# Altium PCB STM32F103ZET6.PCBDOC (part 3 of 5)
Units mil, origin at the board's own origin, x right, y up, seen from the top; angles counter-clockwise.
Board outline 7118.03 x 3660.03 mil, 2 copper layers (Top Layer, Bottom Layer); 158 components, 198 nets, 727 pads, 128 vias.
Unrouted connection lines stored in the file: 5.
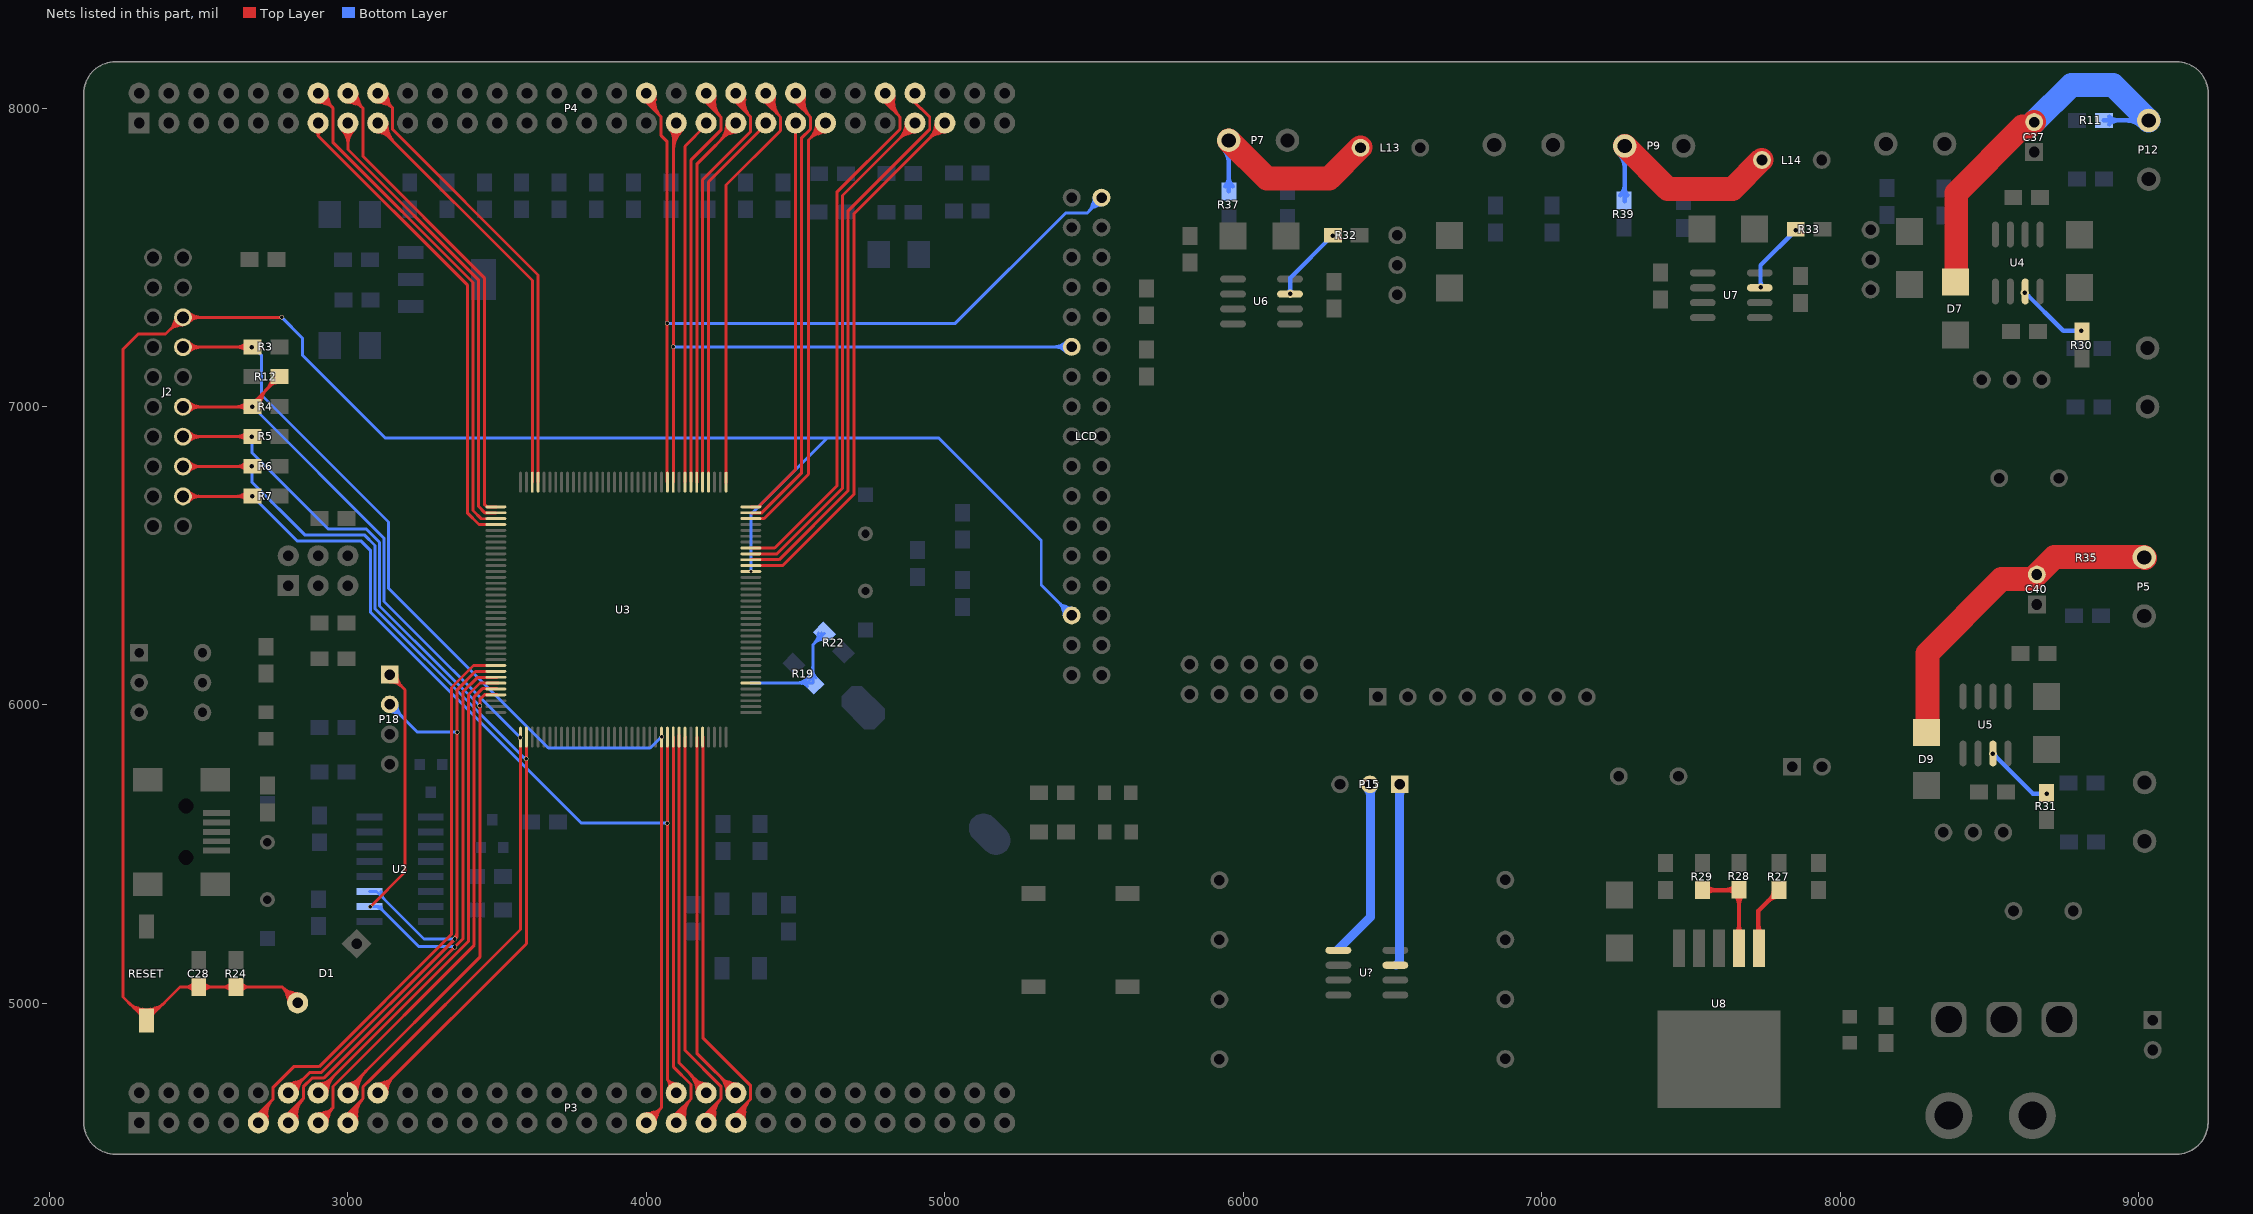
[diagram p3: the nets of this part, all layers, seen from the top]

## Via types
v1: diameter 15, hole 12, Top Layer to Bottom Layer, 57 vias
v2: diameter 28, hole 15, Top Layer to Bottom Layer, 53 vias
v3: diameter 50, hole 28, Top Layer to Bottom Layer, 10 vias
v4: diameter 12, hole 10, Top Layer to Bottom Layer, 4 vias
v5: diameter 20, hole 15, Top Layer to Bottom Layer, 2 vias
v6: diameter 48, hole 28, Top Layer to Bottom Layer, 1 vias
v7: diameter 40, hole 28, Top Layer to Bottom Layer, 1 vias

## Nets (pads, with @x,y where several pads share a name; then routed paths per layer and width w, separated by ;. In a path a pad name is that pad's centre, name@x,y a point inside that pad or via, vN(x,y) a via of type N, cw(c..) or ccw(c..) an arc to the next point about the centre after c; other vN are vias at no path point) (continued)
NetR19_2: R19.2 R22.2 U3.6 | length 1000.7
  Bottom Layer w10: 4349,6073 4349.18,6073.18 R19.2@4557.82,6073.18 4557.82,6201.82 R22.2@4596,6240 ; R19.2@4540.14,6090.86 cw(c4497.46,6133.54) 4497.46,6073.18 ccw(c4497.46,6133.54) R19.2@4540.14,6090.86 ; R19.2@4540.14,6090.86 ccw(c4497.46,6133.54) 4557.82,6133.54 cw(c4497.46,6133.54) R19.2@4540.14,6090.86 ; R19.2@4547.21,6083.79 cw(c4521.61,6109.39) 4521.61,6073.18 ccw(c4521.61,6109.39) R19.2@4547.21,6083.79 ; R19.2@4547.21,6083.79 ccw(c4521.61,6109.39) 4557.82,6109.39 cw(c4521.61,6109.39) R19.2@4547.21,6083.79 ; 4514.54,6073.18 cw(c4514.54,6036.97) 4540.14,6062.57 ccw(c4514.54,6036.97) 4514.54,6073.18 ; 4557.82,6116.46 ccw(c4594.03,6116.46) 4568.43,6090.86 cw(c4594.03,6116.46) 4557.82,6116.46 ; 4561.59,6205.59 ccw(c4526.35,6240.82) 4576.18,6240.82 cw(c4526.35,6240.82) 4561.59,6205.59 ; 4563.13,6207.13 cw(c4596.18,6174.08) 4596.18,6220.82 ccw(c4596.18,6174.08) 4563.13,6207.13 ; 4578.66,6222.66 ccw(c4560.49,6240.82) 4586.18,6240.82 cw(c4560.49,6240.82) 4578.66,6222.66
NetR27_1: R27.1 U8.1 | length 340.9
  Top Layer w15: U8.1@7718.55,5235.86 ccw(c7700.55,5253.85) 7726,5253.85 ; U8.1@7726,5184 7726,5311 R27.1@7795,5380 ; 7726,5262.82 ccw(c7764.14,5262.82) U8.1@7737.17,5235.86 ; 7756.59,5341.59 cw(c7795,5303.18) R27.1@7795,5357.5 ; 7768.66,5353.66 ccw(c7747.32,5375) R27.1@7777.5,5375
NetR28_1: R28.1 R29.2 U8.2 | length 566.4
  Top Layer w15: R29.2@7538,5380 7660,5380 R28.1@7661,5381 U8.2@7661,5187 ; R29.2@7550.37,5367.63 cw(c7580.25,5337.75) 7580.25,5380 cw(c7580.25,5422.25) R29.2@7550.37,5392.37 ; 7616.34,5380 ccw(c7616.34,5425.66) R28.1@7648.63,5393.37 ; 7621.17,5380 cw(c7621.17,5341.17) R28.1@7648.63,5368.63 ; R28.1@7648.63,5363.63 cw(c7618.75,5333.75) 7661,5333.75 cw(c7703.25,5333.75) R28.1@7673.37,5363.63 ; U8.2@7651.62,5235.86 ccw(c7628.96,5258.51) 7661,5258.51 ; 7661,5258.17 ccw(c7692.55,5258.17) U8.2@7670.24,5235.86
NetR30_1: R30.1 U4.7 | length 279.9
  Bottom Layer w15: v2@8619,7374.5 cw(c8619,7356.39) 8631.8,7369.2 ; v2@8619,7382 8747,7254 v2(8807,7254) ; v2@8802.4,7249.4 ccw(c8791.31,7238.31) 8791.31,7254 ccw(c8791.31,7269.69) v2@8802.4,7258.6
  other v2: 8619,7381
NetR31_1: R31.1 U5.7 | length 286.8
  Bottom Layer w15: v2@8512,5830.5 cw(c8512,5814.81) 8523.1,5825.9 cw(c8534.19,5837) v2@8518.5,5837 ; v2(8512,5837) 8646,5703 v2(8692,5703) v2@8694,5703 ; v2@8687.4,5698.4 ccw(c8676.31,5687.31) 8676.31,5703 ccw(c8676.31,5718.69) v2@8687.4,5707.6
NetR32_1: R32.1 U6.7 | length 303.1
  Bottom Layer w15: v2@6152.4,7382.6 ccw(c6141.31,7393.69) 6157,7393.69 ccw(c6172.69,7393.69) v2@6161.6,7382.6 ; v2@6156,7379 6157,7379 6157,7431 v2(6299,7573) ; v2@6292.5,7573 cw(c6276.81,7573) 6287.9,7561.9 cw(c6299,7550.81) v2@6299,7566.5
  other v2: 6157,7378
NetR33_1: R33.1 U7.7 | length 280.5
  Bottom Layer w15: v2@7733,7399 7733,7473 v2(7851,7591) ; 7733,7417.11 ccw(c7752.11,7417.11) v2@7738.6,7403.6 ; v2@7844.5,7591 cw(c7828.81,7591) 7839.9,7579.9 cw(c7851,7568.81) v2@7851,7584.5
  other v2: 7734,7399
NRST: C28.2 D1.1 J2.15 LCD.5 R24.1 RESET.1 U3.25 | length 10237.6
  Top Layer w10: 2290.91,4986.65 cw(c2277.43,4936.38) RESET.1@2325,4957.52 ; 2295.13,4975.52 cw(c2287.78,4948.1) RESET.1@2315.31,4955.07 ; RESET.1@2303.39,4973.31 ccw(c2307.35,4988.1) RESET.1@2315,4974.84 ; RESET.1@2311.14,4981.23 cw(c2302.06,4947.32) RESET.1@2334.14,4961.58 ; RESET.1@2315.86,4961.58 cw(c2347.94,4947.32) RESET.1@2338.86,4981.23 ; RESET.1@2334.69,4955.07 cw(c2362.22,4948.1) 2354.87,4975.52 ; RESET.1@2335,4974.84 ccw(c2342.65,4988.1) RESET.1@2346.61,4973.31 ; 2359.09,4986.65 ccw(c2372.57,4936.38) RESET.1@2325,4957.52 ; 2415.91,7276.26 cw(c2452.7,7266.4) J2.15@2446.14,7303.93 ; 2422.38,7267.4 ccw(c2411.7,7307.24) J2.15@2451.87,7297.86 ; J2.15@2447,7299 v1@2777,7299 ; J2.15@2447,7300 2446,7300 2389,7243 2297,7243 2246,7192 2246,5021.52 RESET.1@2325,4942.52 2437.48,5055 C28.2@2500,5055 R24.1@2625,5055 2780,5055 ; v1(2778,7299) v1@2779,7299 ; 2793.15,5042.79 cw(c2779.72,4992.67) D1.1@2830.75,5002.09 ; 2794.68,5028.3 ccw(c2841.83,5039.61) D1.1@2828.55,4992.97 ; 2808.45,5038.69 cw(c2796.97,4995.86) D1.1@2840.58,5003.91 ; D1.1@2831,5004 2780,5055 ; RESET.1@2325,4957.52 cw(c2325,4993.73) 2299.39,4968.13 ccw(c2325,4993.73) RESET.1@2325,4957.52 ; RESET.1@2325,4957.52 ccw(c2325,4993.73) 2350.61,4968.13 cw(c2325,4993.73) RESET.1@2325,4957.52 ; RESET.1@2325,4967.52 cw(c2325,5027.88) 2282.32,4985.2 ccw(c2325,5027.88) RESET.1@2325,4967.52 ; RESET.1@2325,4967.52 ccw(c2325,5027.88) 2367.68,4985.2 cw(c2325,5027.88) RESET.1@2325,4967.52 ; RESET.1@2325,4977.52 cw(c2325,5062.02) 2265.25,5002.27 ccw(c2325,5062.02) RESET.1@2325,4977.52 ; RESET.1@2325,4977.52 ccw(c2325,5062.02) 2384.75,5002.27 cw(c2325,5062.02) RESET.1@2325,4977.52 ; 2451.72,5055 cw(c2451.72,5006.72) 2485.86,5040.86 ccw(c2451.72,5006.72) 2451.72,5055 ; 2451.72,5055 ccw(c2451.72,5103.28) 2485.86,5069.14 cw(c2451.72,5103.28) 2451.72,5055 ; 2483.21,7299 cw(c2483.21,7335.21) 2457.61,7309.61 ccw(c2483.21,7335.21) 2483.21,7299 ; 2483.21,7299 ccw(c2483.21,7262.79) 2457.61,7288.39 cw(c2483.21,7262.79) 2483.21,7299 ; 2507.36,7299 cw(c2507.36,7359.36) 2464.68,7316.68 ccw(c2507.36,7359.36) 2507.36,7299 ; 2507.36,7299 ccw(c2507.36,7238.64) 2464.68,7281.32 cw(c2507.36,7238.64) 2507.36,7299 ; 2548.28,5055 cw(c2548.28,5103.28) 2514.14,5069.14 ccw(c2548.28,5103.28) 2548.28,5055 ; 2548.28,5055 ccw(c2548.28,5006.72) 2514.14,5040.86 cw(c2548.28,5006.72) 2548.28,5055 ; 2576.72,5055 cw(c2576.72,5006.72) 2610.86,5040.86 ccw(c2576.72,5006.72) 2576.72,5055 ; 2576.72,5055 ccw(c2576.72,5103.28) 2610.86,5069.14 cw(c2576.72,5103.28) 2576.72,5055 ; 2673.28,5055 cw(c2673.28,5103.28) 2639.14,5069.14 ccw(c2673.28,5103.28) 2673.28,5055 ; 2673.28,5055 ccw(c2673.28,5006.72) 2639.14,5040.86 cw(c2673.28,5006.72) 2673.28,5055 ; 2780,5055 cw(c2729.86,5004.85) 2800.75,5002.98 ccw(c2729.86,5004.85) 2780,5055 ; RESET.1@2301.46,4966.06 cw(c2292.93,4957.52) 2305,4957.52 ccw(c2292.93,4957.52) RESET.1@2301.46,4966.06 ; RESET.1@2345,4957.52 cw(c2357.07,4957.52) 2348.54,4966.06 ccw(c2357.07,4957.52) RESET.1@2345,4957.52 ; 2400.91,7254.91 cw(c2447,7208.82) 2447,7274 ccw(c2447,7208.82) 2400.91,7254.91 ; 2405.74,7259.74 ccw(c2366.47,7299) 2422,7299 cw(c2366.47,7299) 2405.74,7259.74 ; 2417.98,7271.98 cw(c2447,7242.96) 2447,7284 ccw(c2447,7242.96) 2417.98,7271.98 ; 2422.81,7276.81 ccw(c2400.62,7299) 2432,7299 cw(c2400.62,7299) 2422.81,7276.81 ; 2782.05,5052.95 ccw(c2831.17,5102.08) 2831.17,5032.61 cw(c2831.17,5102.08) 2782.05,5052.95 ; 2796.46,5038.54 cw(c2761.91,5004) 2810.75,5002.71 ccw(c2761.91,5004) 2796.46,5038.54 ; 2799.12,5035.88 ccw(c2831.17,5067.94) 2831.17,5022.61 cw(c2831.17,5067.94) 2799.12,5035.88
  Bottom Layer w10: v1(2778,7299) 2847,7230 2847,7173 3126,6894 4603,6894 ; v4@4351,6447 4351,6640 4605,6894 4980,6894 5323,6551 5323,6402 LCD.5@5425,6300 ; 5393.65,6323.68 ccw(c5431.95,6333.94) LCD.5@5424,6295.1 ; 5401.32,6331.35 cw(c5391.06,6293.05) LCD.5@5429.9,6301 ; 5382.32,6342.68 cw(c5339.64,6300) 5400,6300 ccw(c5339.64,6300) 5382.32,6342.68 ; 5382.32,6342.68 ccw(c5425,6385.36) 5425,6325 cw(c5425,6385.36) 5382.32,6342.68 ; 5399.39,6325.61 cw(c5373.79,6300) 5410,6300 ccw(c5373.79,6300) 5399.39,6325.61 ; 5399.39,6325.61 ccw(c5425,6351.21) 5425,6315 cw(c5425,6351.21) 5399.39,6325.61
  other v4: 4351,6448
OUTPUT1: P15.1 U?.3 | length 666.1
  Bottom Layer w30: 6512,5128 6524,5140 P15.1@6524,5734 ; P15.1@6513.73,5723.73 cw(c6488.93,5698.93) 6524,5698.93 cw(c6559.07,5698.93) P15.1@6534.27,5723.73
OUTPUT1+: C37.2 D7.2 P12.1 R11.2 | length 1545
  Top Layer w80: D7.2@8389,7417 8389,7715.64 8611.36,7938 8635,7938 C37.2@8650,7953
  Bottom Layer w15: R11.2@8883,7959 8883.26,7958.74 P12.1@9033.26,7958.74 ; R11.2@8901.37,7946.63 cw(c8930.62,7917.38) 8930.62,7958.74 ; R11.2@8901.37,7971.37 ccw(c8931.88,8001.88) 8931.88,7958.74 ; P12.1@9011.46,7936.2 ccw(c8957.06,7881.8) 8957.06,7958.74 ccw(c8957.06,8035.68) P12.1@9011.46,7981.28 ; P12.1@9022.07,7946.81 ccw(c8993.27,7918.01) 8993.27,7958.74 ccw(c8993.27,7999.47) P12.1@9022.07,7970.67
  Bottom Layer w80: C37.2@8650,7953 8775,8078 8914,8078 9033.26,7958.74 P12.1@9034,7958
OUTPUT2: P15.2 U?.5 | length 659.7
  Bottom Layer w30: 6318,5181 6426,5289 6426,5731 P15.2@6419,5738 ; P15.2@6413.73,5723.73 cw(c6384.1,5694.1) 6426,5694.1 ; 6426,5703.76 cw(c6454.24,5703.76) P15.2@6434.27,5723.73
OUTPUT2+: C40.2 D9.2 P5.1 R35.2 | length 1537.5
  Top Layer w80: D9.2@8289,5905 8292,5905 8292,6173 8541,6422 8644,6422 C40.2@8659,6437 8718,6496 9018,6496 P5.1@9021,6493
  Bottom Layer w15: R35.2@8868,6494 8868.74,6494.74 P5.1@9019,6494.74 ; R35.2@8889.37,6481.63 cw(c8921.04,6449.96) 8921.04,6494.74 ; R35.2@8889.37,6506.37 ccw(c8917.46,6534.46) 8917.46,6494.74 ; P5.1@8996.46,6472.2 ccw(c8942.06,6417.8) 8942.06,6494.74 ccw(c8942.06,6571.68) P5.1@8996.46,6517.28 ; P5.1@9007.07,6482.81 ccw(c8978.27,6454.01) 8978.27,6494.74 ccw(c8978.27,6535.47) P5.1@9007.07,6506.67
OUTPUT3+: L13.1 P7.1 R37.2 | length 960.6
  Top Layer w80: P7.1@5951.26,7892 6079.26,7764 6288,7764 L13.1@6393,7869
  Bottom Layer w15: P7.1@5928.72,7869.46 cw(c5874.32,7815.06) 5951.26,7815.06 cw(c6028.2,7815.06) P7.1@5973.8,7869.46 ; P7.1@5939.33,7880.07 cw(c5910.53,7851.27) 5951.26,7851.27 cw(c5991.99,7851.27) P7.1@5963.19,7880.07 ; R37.2@5939.63,7738.37 ccw(c5911.54,7766.46) 5951.26,7766.46 ; R37.2@5951,7721 5951.26,7721.26 P7.1@5951.26,7892 ; 5951.26,7770.04 ccw(c5996.04,7770.04) R37.2@5964.37,7738.37
OUTPUT4+: L14.1 P9.1 R39.2 | length 996
  Top Layer w80: P9.1@7278.26,7873 7422.26,7729 7639,7729 L14.1@7737,7827
  Bottom Layer w15: P9.1@7255.72,7850.46 cw(c7201.32,7796.06) 7278.26,7796.06 cw(c7355.2,7796.06) P9.1@7300.8,7850.46 ; R39.2@7262.63,7707.37 ccw(c7224.88,7745.12) 7278.26,7745.12 ; P9.1@7266.33,7861.07 cw(c7237.53,7832.27) 7278.26,7832.27 cw(c7318.99,7832.27) P9.1@7290.19,7861.07 ; R39.2@7277.5,7687.5 7278.26,7688.26 P9.1@7278.26,7873 ; 7278.26,7729.38 ccw(c7309.38,7729.38) R39.2@7287.37,7707.37
PA0: P4.47 U3.34 | length 1949.1
  Top Layer w10: U3.34@4351,6625 4394.61,6625 4543,6773.39 4543,7893 P4.47@4600,7950 ; 4560.98,7909.11 ccw(c4547.12,7960.83) P4.47@4599.58,7950.09 ; 4576.61,7913.3 ccw(c4564.85,7957.2) P4.47@4609.37,7948.08 ; 4548.05,7898.05 cw(c4600,7846.1) 4600,7919.57 ccw(c4600,7846.1) 4548.05,7898.05 ; 4548.05,7898.05 ccw(c4496.1,7950) 4569.57,7950 cw(c4496.1,7950) 4548.05,7898.05 ; 4565.12,7915.12 cw(c4600,7880.24) 4600,7929.57 ccw(c4600,7880.24) 4565.12,7915.12 ; 4565.12,7915.12 ccw(c4530.24,7950) 4579.57,7950 cw(c4530.24,7950) 4565.12,7915.12
PA1: P4.46 U3.35 | length 2152.2
  Top Layer w10: U3.35@4351,6644 4386.74,6644 4519,6776.26 4519,7899.09 4549.43,7929.52 4549.43,7970.48 ; P4.46@4500,8050 4500,8019.91 4549.43,7970.48 ; P4.46@4506.66,8056.87 cw(c4452.87,8001.4) 4530.13,8002.59 ; P4.46@4513.62,8064.05 cw(c4476.64,8025.91) 4529.76,8026.73 ; 4549.43,7970.48 cw(c4603.04,8024.09) 4529.51,8042.58 ccw(c4603.04,8024.09) 4549.43,7970.48 ; U3.35@4380.14,6643.98 ccw(c4380.14,6659.88) 4391.38,6648.64 cw(c4380.14,6659.88) U3.35@4380.14,6643.98 ; P4.46@4500.42,8049.89 ccw(c4543.26,8039.12) 4512.02,8007.88 cw(c4543.26,8039.12) P4.46@4500.42,8049.89 ; P4.46@4510.12,8047.46 ccw(c4563.19,8034.11) 4524.49,7995.42 cw(c4563.19,8034.11) P4.46@4510.12,8047.46 ; P4.46@4519.82,8045.02 ccw(c4583.11,8029.1) 4536.96,7982.95 cw(c4583.11,8029.1) P4.46@4519.82,8045.02
PA2: P4.45 U3.36 | length 1379.7
  Top Layer w10: U3.36@4351,6664 4375.3,6664 4500,6788.7 P4.45@4500,7950 ; U3.36@4379.89,6663.92 cw(c4391.17,6663.92) 4383.19,6671.89 ccw(c4391.17,6663.92) U3.36@4379.89,6663.92
PA3: P4.44 U3.37 | length 2000.7
  Top Layer w10: U3.37@4267,6743 4267,7742 4449.43,7924.43 4449.43,7970.48 ; P4.44@4400,8050 4400,8019.91 4449.43,7970.48 ; P4.44@4406.66,8056.87 cw(c4352.87,8001.4) 4430.13,8002.59 ; P4.44@4413.62,8064.05 cw(c4376.64,8025.91) 4429.76,8026.73 ; 4449.43,7970.48 cw(c4503.04,8024.09) 4429.51,8042.58 ccw(c4503.04,8024.09) 4449.43,7970.48 ; P4.44@4400.42,8049.89 ccw(c4443.26,8039.12) 4412.02,8007.88 cw(c4443.26,8039.12) P4.44@4400.42,8049.89 ; P4.44@4410.12,8047.46 ccw(c4463.19,8034.11) 4424.49,7995.42 cw(c4463.19,8034.11) P4.44@4410.12,8047.46 ; P4.44@4419.82,8045.02 ccw(c4483.11,8029.1) 4436.96,7982.95 cw(c4483.11,8029.1) P4.44@4419.82,8045.02
PA4: P4.43 U3.40 | length 1283.5
  Top Layer w10: U3.40@4208,6746 4208,7753 4400,7945 P4.43@4400,7950
PA5: P4.42 U3.41 | length 1989
  Top Layer w10: U3.41@4188,6746 4188,7759.87 4349.43,7921.3 4349.43,7970.48 ; P4.42@4300,8050 4300,8019.91 4349.43,7970.48 ; P4.42@4306.66,8056.87 cw(c4252.87,8001.4) 4330.13,8002.59 ; P4.42@4313.62,8064.05 cw(c4276.64,8025.91) 4329.76,8026.73 ; 4349.43,7970.48 cw(c4403.04,8024.09) 4329.51,8042.58 ccw(c4403.04,8024.09) 4349.43,7970.48 ; P4.42@4300.42,8049.89 ccw(c4343.26,8039.12) 4312.02,8007.88 cw(c4343.26,8039.12) P4.42@4300.42,8049.89 ; P4.42@4310.12,8047.46 ccw(c4363.19,8034.11) 4324.49,7995.42 cw(c4363.19,8034.11) P4.42@4310.12,8047.46 ; P4.42@4319.82,8045.02 ccw(c4383.11,8029.1) 4336.96,7982.95 cw(c4383.11,8029.1) P4.42@4319.82,8045.02
PA6: P4.41 U3.42 | length 1841.1
  Top Layer w10: U3.42@4169,6746 4169,7812 4300,7943 P4.41@4300,7950 ; 4269.46,7912.27 cw(c4305.44,7902.63) P4.41@4301.19,7939.64 ; 4273.26,7926.47 cw(c4303.64,7918.33) P4.41@4300.05,7949.57 ; 4279.41,7914.05 ccw(c4268.81,7953.62) P4.41@4309.5,7948.9 ; 4243.1,7886.1 ccw(c4179.2,7950) 4269.57,7950 cw(c4179.2,7950) 4243.1,7886.1 ; 4260,7903 cw(c4300,7862.99) 4300,7919.57 ccw(c4300,7862.99) 4260,7903 ; 4260.17,7903.17 ccw(c4213.34,7950) 4279.57,7950 cw(c4213.34,7950) 4260.17,7903.17 ; 4277.07,7920.07 cw(c4300,7897.14) 4300,7929.57 ccw(c4300,7897.14) 4277.07,7920.07 ; 4277.24,7920.24 ccw(c4247.48,7950) 4289.57,7950 cw(c4247.48,7950) 4277.24,7920.24
PA7: P4.40 U3.43 | length 1960.7
  Top Layer w10: U3.43@4149,6749 4149,7825 4249.43,7925.43 4249.43,7970.48 ; P4.40@4200,8050 4200,8019.91 4249.43,7970.48 ; P4.40@4206.66,8056.87 cw(c4152.87,8001.4) 4230.13,8002.59 ; P4.40@4213.62,8064.05 cw(c4176.64,8025.91) 4229.76,8026.73 ; 4249.43,7970.48 cw(c4303.04,8024.09) 4229.51,8042.58 ccw(c4303.04,8024.09) 4249.43,7970.48 ; P4.40@4200.42,8049.89 ccw(c4243.26,8039.12) 4212.02,8007.88 cw(c4243.26,8039.12) P4.40@4200.42,8049.89 ; P4.40@4210.12,8047.46 ccw(c4263.19,8034.11) 4224.49,7995.42 cw(c4263.19,8034.11) P4.40@4210.12,8047.46 ; P4.40@4219.82,8045.02 ccw(c4283.11,8029.1) 4236.96,7982.95 cw(c4283.11,8029.1) P4.40@4219.82,8045.02
PA8: P3.9 U3.100 | length 2557.8
  Top Layer w10: P3.9@2700,4600 2700,4630.09 2749.43,4679.52 ; P3.9@2706.66,4593.13 ccw(c2652.87,4648.6) 2730.13,4647.41 ; P3.9@2713.62,4585.95 ccw(c2676.64,4624.09) 2729.76,4623.27 ; U3.100@3500,6132.17 3420.26,6132.17 3347,6058.91 3347,5231.61 2903.39,4788 2818.09,4788 2749.43,4719.34 2749.43,4679.52 ; 2749.43,4679.52 ccw(c2803.04,4625.91) 2729.51,4607.42 cw(c2803.04,4625.91) 2749.43,4679.52 ; P3.9@2700.42,4600.11 cw(c2743.26,4610.88) 2712.02,4642.12 ccw(c2743.26,4610.88) P3.9@2700.42,4600.11 ; P3.9@2710.12,4602.54 cw(c2763.19,4615.89) 2724.49,4654.58 ccw(c2763.19,4615.89) P3.9@2710.12,4602.54 ; P3.9@2719.82,4604.98 cw(c2783.11,4620.9) 2736.96,4667.05 ccw(c2783.11,4620.9) P3.9@2719.82,4604.98
PA9: P3.12 P18.2 U2.3 U3.101 | length 3151.7
  Top Layer w10: P3.12@2790.7,4702.26 cw(c2837.01,4691.02) 2824.68,4737.04 ; P3.12@2800,4700 2805.09,4705.09 2808.31,4705.09 2871.65,4768.43 2910.69,4768.43 3366,5223.74 3366,6051.04 3426.76,6111.8 U3.101@3495,6111.8 ; P3.12@2800.42,4699.9 cw(c2855.67,4686.49) 2840.96,4741.41 ; v1@3360.41,5216.65 cw(c3374.21,5220.34) 3361.84,5227.48 ; P3.12@2800,4720.43 ccw(c2800,4777.54) 2840.38,4737.16 cw(c2800,4777.54) P3.12@2800,4720.43 ; P3.12@2800,4730.43 ccw(c2800,4811.68) 2857.45,4754.23 cw(c2800,4811.68) P3.12@2800,4730.43 ; P3.12@2820.43,4700 cw(c2861.99,4700) 2832.6,4729.38 ccw(c2861.99,4700) P3.12@2820.43,4700 ; P3.12@2830.43,4700 cw(c2896.13,4700) 2849.67,4746.45 ccw(c2896.13,4700) P3.12@2830.43,4700 ; v1@3356.23,5217.77 ccw(c3332.65,5241.35) 3366,5241.35 cw(c3332.65,5241.35) v1@3356.23,5217.77
  Bottom Layer w10: U2.3@3072.64,5375 3096,5375 3255,5216 v1@3357,5216 ; P18.2@3140,5977.47 cw(c3140,5918.26) 3181.87,5960.13 cw(c3223.74,6002) P18.2@3164.53,6002 ; P18.2@3140,5987.47 cw(c3140,5952.4) 3164.8,5977.2 cw(c3189.6,6002) P18.2@3154.53,6002 ; P18.2@3140,6002 3233,5909 v1@3365,5909 ; 3357.55,5909 cw(c3357.55,5899.55) v1@3364.23,5906.23 ; U2.3@3110.95,5375 ccw(c3147.03,5375) 3121.51,5349.49 cw(c3147.03,5375) U2.3@3110.95,5375
  other v1: 3358,5216 3366,5908
PA10: P3.11 P18.1 U2.2 U3.102 | length 3859.9
  Top Layer w10: P3.11@2800,4600 2800,4630.09 2850.57,4680.66 ; P3.11@2806.56,4593.03 ccw(c2753.6,4649.3) 2830.83,4646.96 ; P3.11@2813.41,4585.75 ccw(c2777,4624.44) 2830.1,4622.83 ; v1@3076,5325 3191,5440 3191,6051 P18.1@3140,6102 ; P18.1@3140,6077.47 cw(c3140,6018.26) 3181.87,6060.13 cw(c3223.74,6102) P18.1@3164.53,6102 ; P18.1@3140,6087.47 cw(c3140,6052.4) 3164.8,6077.2 cw(c3189.6,6102) P18.1@3154.53,6102 ; U3.102@3500,6092.8 3434.63,6092.8 3385,6043.17 3385,5215.87 2918.56,4749.43 2879.52,4749.43 2850.57,4720.48 2850.57,4680.66 ; 2850.56,4680.65 ccw(c2906.19,4625.03) 2829.62,4606.98 cw(c2906.19,4625.03) 2850.56,4680.65 ; P3.11@2800.42,4600.1 cw(c2844.58,4610.51) 2812.5,4642.59 ccw(c2844.58,4610.51) P3.11@2800.42,4600.1 ; P3.11@2810.15,4602.39 cw(c2865.12,4615.35) 2825.19,4655.28 ccw(c2865.12,4615.35) P3.11@2810.15,4602.39 ; P3.11@2819.89,4604.69 cw(c2885.65,4620.19) 2837.88,4667.97 ccw(c2885.65,4620.19) P3.11@2819.89,4604.69
  Bottom Layer w10: U2.2@3072.64,5325 3103,5325 3238,5190 v1@3358,5190 ; U2.2@3076.77,5322.23 cw(c3083.45,5315.55) U2.2@3083.45,5325 ; U2.2@3104.13,5318.19 cw(c3104.13,5304.48) 3113.83,5314.17 ccw(c3104.13,5304.48) U2.2@3104.13,5318.19 ; U2.2@3110.95,5325 ccw(c3130.13,5325) 3116.56,5311.44 cw(c3130.13,5325) U2.2@3110.95,5325 ; 3349.55,5190 cw(c3349.55,5180.55) 3356.23,5187.23 ccw(c3349.55,5180.55) 3349.55,5190
  other v1: 3358,5189 3075,5324
PA11: P3.14 U3.103 | length 2046.8
  Top Layer w10: P3.14@2900,4700 2900,4704 3404,5208 3404,6035.3 3442.5,6073.8 U3.103@3505,6073.8 ; P3.14@2900,4720.43 ccw(c2900,4760.11) 2928.05,4732.05 cw(c2900,4760.11) P3.14@2900,4720.43 ; P3.14@2900,4730.43 ccw(c2900,4794.25) 2945.12,4749.12 cw(c2900,4794.25) P3.14@2900,4730.43 ; P3.14@2920.43,4700 cw(c2979.42,4700) 2937.71,4741.71 ccw(c2979.42,4700) P3.14@2920.43,4700 ; P3.14@2930.43,4700 cw(c3013.56,4700) 2954.78,4758.78 ccw(c3013.56,4700) P3.14@2930.43,4700
PA12: P3.13 U3.104 | length 2198
  Top Layer w10: P3.13@2890.76,4602.49 cw(c2936.63,4590.13) 2925.6,4636.33 ; P3.13@2900,4600 2950,4650 ; P3.13@2902.49,4590.76 ccw(c2890.13,4636.63) 2936.33,4625.6 ; U3.104@3500,6054.62 3450.19,6054.62 3423,6027.43 3423,5195 2950,4722 2950,4650 ; 2933.57,4633.57 cw(c2901.8,4665.34) 2900.56,4620.43 ccw(c2901.8,4665.34) 2933.57,4633.57 ; 2933.57,4633.57 ccw(c2965.34,4601.8) 2920.43,4600.56 cw(c2965.34,4601.8) 2933.57,4633.57 ; 2950,4650 cw(c2902.68,4697.32) 2900.84,4630.42 ccw(c2902.68,4697.32) 2950,4650 ; 2950,4650 ccw(c2997.32,4602.68) 2930.42,4600.84 cw(c2997.32,4602.68) 2950,4650
PA13: J2.7 P3.16 R5.1 U3.105 | length 4373.7
  Top Layer w10: J2.7@2447,6899 v2(2678,6899) 2679,6899 R5.1@2680,6900 ; P3.16@2990.44,4700.3 cw(c3027.88,4699.12) 3018.19,4735.31 ; P3.16@2997.9,4710.22 ccw(c2989,4753.53) 3031.71,4742.09 ; P3.16@2999.91,4700.42 ccw(c2992.65,4735.79) 3027.52,4726.44 ; P3.16@3000,4700 3000,4713 3442,5155 v1@3442,5997.84 ; v1@3442,5999 3442,6019.56 3457.37,6034.93 U3.105@3500,6034.93 ; 2483.21,6899 cw(c2483.21,6935.21) 2457.61,6909.61 ccw(c2483.21,6935.21) 2483.21,6899 ; 2483.21,6899 ccw(c2483.21,6862.79) 2457.61,6888.39 cw(c2483.21,6862.79) 2483.21,6899 ; 2507.36,6899 cw(c2507.36,6959.36) 2464.68,6916.68 ccw(c2507.36,6959.36) 2507.36,6899 ; 2507.36,6899 ccw(c2507.36,6838.64) 2464.68,6881.32 cw(c2507.36,6838.64) 2507.36,6899 ; R5.1@2656.27,6899 cw(c2656.27,6877.27) 2671.64,6892.64 ccw(c2656.27,6877.27) R5.1@2656.27,6899 ; R5.1@2656.27,6899 ccw(c2656.27,6920.73) 2671.64,6905.36 cw(c2656.27,6920.73) R5.1@2656.27,6899 ; 2624.3,6899 ccw(c2624.3,6950.7) 2660.86,6914.14 cw(c2624.3,6950.7) 2624.3,6899 ; 2629.13,6899 cw(c2629.13,6854.13) 2660.86,6885.86 ccw(c2629.13,6854.13) 2629.13,6899 ; 2648.44,6899 ccw(c2648.44,6926.56) 2667.93,6907.07 cw(c2648.44,6926.56) 2648.44,6899 ; P3.16@3000,4730.43 ccw(c3000,4772.52) 3029.76,4742.76 cw(c3000,4772.52) P3.16@3000,4730.43 ; P3.16@3010.43,4700 cw(c3067.01,4700) 3027,4740 ccw(c3067.01,4700) P3.16@3010.43,4700 ; P3.16@3020.43,4700 cw(c3101.15,4700) 3044.07,4757.07 ccw(c3101.15,4700) P3.16@3020.43,4700 ; P3.16@3030.43,4700 cw(c3135.29,4700) 3061.14,4774.14 ccw(c3135.29,4700) P3.16@3030.43,4700 ; v1@3439.23,5995.23 cw(c3432.55,5988.55) 3442,5988.55 ccw(c3432.55,5988.55) v1@3439.23,5995.23 ; v1@3439.23,5998.77 ccw(c3432.55,6005.45) 3442,6005.45 cw(c3432.55,6005.45) v1@3439.23,5998.77 ; 3450.59,6028.15 cw(c3465.31,6013.44) 3465.31,6034.25 ccw(c3465.31,6013.44) 3450.59,6028.15
  Bottom Layer w10: v2(2678,6899) 2678,6846 2935,6589 3062,6589 3106,6545 3106,6332 3336.57,6101.43 3337,6101.43 v1@3442.21,5996.21 ; 2678,6877.27 cw(c2699.73,6877.27) 2684.36,6892.64 ccw(c2699.73,6877.27) 2678,6877.27 ; 2678,6877.27 ccw(c2656.27,6877.27) 2671.64,6892.64 cw(c2656.27,6877.27) 2678,6877.27
  other v1: 3441,5997
PA14: J2.9 P3.15 R4.1 R12.2 U3.109 | length 5522.2
  Top Layer w10: J2.9@2447,6999 R4.1@2679,6999 ; R4.1@2680,6999 v2(2680,7000) 2680,7010 R12.2@2770,7100 ; R4.1@2680.48,6999.12 ccw(c2668.27,7021.66) R4.1@2693.03,7015.02 ; R4.1@2680.95,7008.95 ccw(c2684.36,7041.23) R4.1@2704.77,7015.99 ; R4.1@2682.55,7009.69 ccw(c2675.58,7037.22) 2703,7029.87 ; R4.1@2688.95,6999.05 cw(c2699.88,6997.9) R4.1@2692.97,7006.45 ; R4.1@2688.99,7000.46 cw(c2709.05,7001.5) R4.1@2699.25,7019.03 ; R4.1@2689.06,6990.86 ccw(c2674.8,7022.94) R4.1@2708.71,7013.86 ; R4.1@2700.79,7021.61 ccw(c2715.58,7017.65) R4.1@2702.32,7010 ; 2714.14,7034.09 cw(c2663.86,7047.57) R4.1@2685,7000 ; 2737.45,7071.84 cw(c2776.25,7061.44) R12.2@2765,7100 ; R12.2@2742.05,7089 cw(c2770.43,7081.4) R12.2@2762.2,7109.6 ; P3.15@3000,4600 3000,4630.09 3050.57,4680.66 ; P3.15@3006.56,4593.03 ccw(c2953.6,4649.3) 3030.83,4646.96 ; P3.15@3013.41,4585.75 ccw(c2977,4624.44) 3030.1,4622.83 ; U3.109@3578,5888.83 3578,5248 3079.52,4749.52 3079.52,4749.43 3050.57,4720.48 3050.57,4680.66 ; 2483.21,6999 cw(c2483.21,7035.21) 2457.61,7009.61 ccw(c2483.21,7035.21) 2483.21,6999 ; 2483.21,6999 ccw(c2483.21,6962.79) 2457.61,6988.39 cw(c2483.21,6962.79) 2483.21,6999 ; 2507.36,6999 cw(c2507.36,7059.36) 2464.68,7016.68 ccw(c2507.36,7059.36) 2507.36,6999 ; 2507.36,6999 ccw(c2507.36,6938.64) 2464.68,6981.32 cw(c2507.36,6938.64) 2507.36,6999 ; R4.1@2685,7000 cw(c2721.21,7000) 2695.61,7025.61 ccw(c2721.21,7000) R4.1@2685,7000 ; 3050.56,4680.65 ccw(c3106.19,4625.03) 3029.62,4606.98 cw(c3106.19,4625.03) 3050.56,4680.65 ; 2624.3,6999 ccw(c2624.3,7050.7) 2660.86,7014.14 cw(c2624.3,7050.7) 2624.3,6999 ; 2629.13,6999 cw(c2629.13,6954.13) 2660.86,6985.86 ccw(c2629.13,6954.13) 2629.13,6999 ; 2648.44,6999 ccw(c2648.44,7026.56) 2667.93,7007.07 cw(c2648.44,7026.56) 2648.44,6999 ; R4.1@2655.86,6999 ccw(c2655.86,7024.14) 2673.64,7006.36 cw(c2655.86,7024.14) R4.1@2655.86,6999 ; R4.1@2660.69,6999 cw(c2660.69,6980.69) 2673.64,6993.64 ccw(c2660.69,6980.69) R4.1@2660.69,6999 ; R4.1@2679,7000 cw(c2700.73,7000) 2685.36,7015.36 ccw(c2700.73,7000) R4.1@2679,7000 ; R4.1@2685,7020 ccw(c2685,7032.07) 2693.54,7023.54 cw(c2685,7032.07) R4.1@2685,7020 ; R4.1@2689,7000 cw(c2734.87,7000) 2702.44,7032.44 ccw(c2734.87,7000) R4.1@2689,7000 ; R4.1@2695,7000 cw(c2755.36,7000) 2712.68,7042.68 ccw(c2755.36,7000) R4.1@2695,7000 ; R4.1@2705,7000 cw(c2789.5,7000) 2729.75,7059.75 ccw(c2789.5,7000) R4.1@2705,7000 ; 2727.32,7057.32 ccw(c2684.64,7100) 2745,7100 cw(c2684.64,7100) 2727.32,7057.32 ; 2739.39,7069.39 cw(c2765,7043.79) 2765,7080 ccw(c2765,7043.79) 2739.39,7069.39 ; 2744.39,7074.39 ccw(c2718.79,7100) 2755,7100 cw(c2718.79,7100) 2744.39,7074.39 ; P3.15@3000.42,4600.1 cw(c3044.58,4610.51) 3012.5,4642.59 ccw(c3044.58,4610.51) P3.15@3000.42,4600.1 ; P3.15@3010.15,4602.39 cw(c3065.12,4615.35) 3025.19,4655.28 ccw(c3065.12,4615.35) P3.15@3010.15,4602.39 ; P3.15@3019.89,4604.69 cw(c3085.65,4620.19) 3037.88,4667.97 ccw(c3085.65,4620.19) P3.15@3019.89,4604.69 ; U3.109@3575.23,5889.23 cw(c3568.55,5882.55) 3578,5882.55 ccw(c3568.55,5882.55) U3.109@3575.23,5889.23
  Bottom Layer w10: v2(2680,7000) 3121,6559 3121,6347 v1(3577,5891) ; 2695.36,6984.64 cw(c2710.73,7000) 2689,7000 ccw(c2710.73,7000) 2695.36,6984.64 ; 2695.36,6984.64 ccw(c2680,6969.27) 2680,6991 cw(c2680,6969.27) 2695.36,6984.64
PA15: J2.5 P3.18 R6.1 U3.110 | length 4308.2
  Top Layer w10: J2.5@2447,6799 2676,6799 R6.1@2680,6795 ; P3.18@3090.58,4701.7 cw(c3134.01,4693.87) 3122.59,4736.49 ; P3.18@3100,4700 3100,4702 3598,5200 3598,5771.13 3598.17,5771.3 U3.110@3598.17,5890 ; P3.18@3100.43,4699.92 cw(c3151.16,4690.77) 3137.81,4740.57 ; 2483.21,6799 cw(c2483.21,6835.21) 2457.61,6809.61 ccw(c2483.21,6835.21) 2483.21,6799 ; 2483.21,6799 ccw(c2483.21,6762.79) 2457.61,6788.39 cw(c2483.21,6762.79) 2483.21,6799 ; 2507.36,6799 cw(c2507.36,6859.36) 2464.68,6816.68 ccw(c2507.36,6859.36) 2507.36,6799 ; 2507.36,6799 ccw(c2507.36,6738.64) 2464.68,6781.32 cw(c2507.36,6738.64) 2507.36,6799 ; 2624.3,6799 ccw(c2624.3,6850.7) 2660.86,6814.14 cw(c2624.3,6850.7) 2624.3,6799 ; 2629.13,6799 cw(c2629.13,6754.13) 2660.86,6785.86 ccw(c2629.13,6754.13) 2629.13,6799 ; 2648.44,6799 ccw(c2648.44,6826.56) 2667.93,6807.07 cw(c2648.44,6826.56) 2648.44,6799 ; R6.1@2653.86,6799 ccw(c2653.86,6824.14) 2671.64,6806.36 cw(c2653.86,6824.14) R6.1@2653.86,6799 ; R6.1@2658.69,6799 cw(c2658.69,6780.69) 2671.64,6793.64 ccw(c2658.69,6780.69) R6.1@2658.69,6799 ; P3.18@3100,4720.43 ccw(c3100,4764.93) 3131.47,4733.47 cw(c3100,4764.93) P3.18@3100,4720.43 ; P3.18@3100,4730.43 ccw(c3100,4799.08) 3148.54,4750.54 cw(c3100,4799.08) P3.18@3100,4730.43 ; P3.18@3120.43,4700 cw(c3174.59,4700) 3136.3,4738.3 ccw(c3174.59,4700) P3.18@3120.43,4700 ; P3.18@3130.43,4700 cw(c3208.73,4700) 3153.37,4755.37 ccw(c3208.73,4700) P3.18@3130.43,4700 ; v1@3595.23,5818.23 cw(c3588.13,5811.13) 3598.17,5811.13 ccw(c3588.13,5811.13) v1@3595.23,5818.23 ; v1@3595.23,5821.77 ccw(c3588.13,5828.87) 3598.17,5828.87 cw(c3588.13,5828.87) v1@3595.23,5821.77
  Bottom Layer w10: v2(2678,6800) 2678,6747 2855,6570 3055,6570 3091,6534 3091,6322.25 3433.75,5979.5 3433.75,5979.25 3593.39,5819.61 v1@3597.61,5819.61 ; 3586.16,5825.4 cw(c3582.47,5811.61) v1@3594.83,5818.75 ; 2678,6778.27 cw(c2699.73,6778.27) 2684.36,6793.64 ccw(c2699.73,6778.27) 2678,6778.27 ; 2678,6778.27 ccw(c2656.27,6778.27) 2671.64,6793.64 cw(c2656.27,6778.27) 2678,6778.27 ; 3585.9,5827.1 ccw(c3597,5838.19) 3597,5822.5 cw(c3597,5838.19) 3585.9,5827.1
  other v1: 3597,5820
PB0: LCD.23 P4.37 U3.46 | length 3342.4
  Top Layer w10: U3.46@4090,6747 4090,7914 4100,7924 P4.37@4100,7950 ; 4090,7900.67 cw(c4149.33,7900.67) 4107.38,7942.62 ccw(c4149.33,7900.67) 4090,7900.67 ; 4090,7900.67 ccw(c4050.67,7900.67) 4078.48,7928.48 cw(c4050.67,7900.67) 4090,7900.67 ; P4.37@4083.58,7924.38 cw(c4076.06,7912.64) 4090,7912.64 ccw(c4076.06,7912.64) P4.37@4083.58,7924.38 ; 4090,7852.39 cw(c4197.61,7852.39) 4121.52,7928.48 ccw(c4197.61,7852.39) 4090,7852.39 ; 4090,7876.53 cw(c4173.47,7876.53) 4114.45,7935.55 ccw(c4173.47,7876.53) 4090,7876.53
  Bottom Layer w10: v1@4091,7200 LCD.23@5425,7200 ; 5364.64,7200 cw(c5364.64,7139.64) 5407.32,7182.32 ccw(c5364.64,7139.64) 5364.64,7200 ; 5364.64,7200 ccw(c5364.64,7260.36) 5407.32,7217.68 cw(c5364.64,7260.36) 5364.64,7200 ; 5388.79,7200 cw(c5388.79,7163.79) 5414.39,7189.39 ccw(c5388.79,7163.79) 5388.79,7200 ; 5388.79,7200 ccw(c5388.79,7236.21) 5414.39,7210.61 cw(c5388.79,7236.21) 5388.79,7200 ; v1@4091.77,7202.77 ccw(c4098.45,7209.45) 4098.45,7200 cw(c4098.45,7209.45) v1@4091.77,7202.77
  other v1: 4090,7201
PB1: LCD.34 P4.36 U3.47 | length 3954.1
  Top Layer w10: P4.36@4000,8050 4000,8019.91 4049.43,7970.48 ; P4.36@4006.66,8056.87 cw(c3952.87,8001.4) 4030.13,8002.59 ; P4.36@4013.62,8064.05 cw(c3976.64,8025.91) 4029.76,8026.73 ; U3.47@4069.43,6747 4069.43,7887.44 4049.43,7907.44 4049.43,7970.48 ; 4049.43,7970.48 cw(c4103.04,8024.09) 4029.51,8042.58 ccw(c4103.04,8024.09) 4049.43,7970.48 ; P4.36@4000.42,8049.89 ccw(c4043.26,8039.12) 4012.02,8007.88 cw(c4043.26,8039.12) P4.36@4000.42,8049.89 ; P4.36@4010.12,8047.46 ccw(c4063.19,8034.11) 4024.49,7995.42 cw(c4063.19,8034.11) P4.36@4010.12,8047.46 ; P4.36@4019.82,8045.02 ccw(c4083.11,8029.1) 4036.96,7982.95 cw(c4083.11,8029.1) P4.36@4019.82,8045.02
  Bottom Layer w10: P4.36@3999,8051 P4.36@4000,8050 ; v1@4069,7279 5034.87,7279 5403.87,7648 5476,7648 5525,7697 LCD.34@5525,7700 ; 5493.28,7674.91 cw(c5533.91,7664.02) LCD.34@5523.8,7704.85 ; 5502.73,7669.03 ccw(c5493.07,7705.1) LCD.34@5529.94,7699.21 ; 5480.2,7652.2 ccw(c5432.4,7700) 5500,7700 cw(c5432.4,7700) 5480.2,7652.2 ; 5487.44,7659.44 cw(c5525,7621.89) 5525,7675 ccw(c5525,7621.89) 5487.44,7659.44 ; 5497.27,7669.27 ccw(c5466.54,7700) 5510,7700 cw(c5466.54,7700) 5497.27,7669.27 ; 5504.51,7676.51 cw(c5525,7656.03) 5525,7685 ccw(c5525,7656.03) 5504.51,7676.51
  other v1: 4070,7279
PB3: J2.13 P3.35 R3.1 U3.133 | length 4821.7
  Top Layer w10: J2.13@2447,7199 v2(2677,7199) 2679,7199 R3.1@2680,7200 R3.1@2681,7201 ; P3.35@3990.72,4602.31 cw(c4036.11,4591.02) 4024.88,4636.44 ; P3.35@4000,4600 4050.57,4650.57 ; P3.35@4002.31,4590.72 ccw(c3991.02,4636.11) 4036.44,4624.88 ; U3.133@4051,5892 4051,4721.34 4050.57,4720.91 4050.57,4650.57 ; 2483.21,7199 cw(c2483.21,7235.21) 2457.61,7209.61 ccw(c2483.21,7235.21) 2483.21,7199 ; 2483.21,7199 ccw(c2483.21,7162.79) 2457.61,7188.39 cw(c2483.21,7162.79) 2483.21,7199 ; 2507.36,7199 cw(c2507.36,7259.36) 2464.68,7216.68 ccw(c2507.36,7259.36) 2507.36,7199 ; 2507.36,7199 ccw(c2507.36,7138.64) 2464.68,7181.32 cw(c2507.36,7138.64) 2507.36,7199 ; R3.1@2655.27,7199 cw(c2655.27,7177.27) 2670.64,7192.64 ccw(c2655.27,7177.27) R3.1@2655.27,7199 ; R3.1@2655.27,7199 ccw(c2655.27,7220.73) 2670.64,7205.36 cw(c2655.27,7220.73) R3.1@2655.27,7199 ; 4033.95,4633.95 cw(c4001.29,4666.61) 4000.4,4620.43 ccw(c4001.29,4666.61) 4033.95,4633.95 ; 4033.95,4633.95 ccw(c4066.61,4601.29) 4020.43,4600.4 cw(c4066.61,4601.29) 4033.95,4633.95 ; 4050.56,4650.56 cw(c4001.92,4699.21) 4000.59,4630.43 ccw(c4001.92,4699.21) 4050.56,4650.56 ; 4050.56,4650.56 ccw(c4099.21,4601.92) 4030.43,4600.59 cw(c4099.21,4601.92) 4050.56,4650.56 ; 2624.3,7199 ccw(c2624.3,7250.7) 2660.86,7214.14 cw(c2624.3,7250.7) 2624.3,7199 ; 2629.13,7199 cw(c2629.13,7154.13) 2660.86,7185.86 ccw(c2629.13,7154.13) 2629.13,7199 ; 2648.44,7199 ccw(c2648.44,7226.56) 2667.93,7207.07 cw(c2648.44,7226.56) 2648.44,7199
  Bottom Layer w10: v2@2676.08,7198.61 ccw(c2695.33,7206.71) 2689.92,7186.54 ; v2(2677,7199) 2683,7199 2710,7172 2710,7039 3136,6613 3136,6391 3671.5,5855.5 4012.5,5855.5 v1@4050,5893 ; 4045.03,5888.03 cw(c4051,5882.05) v1@4051,5890.5 ; v2@2677,7190 cw(c2677,7153.79) 2702.61,7179.39 ccw(c2677,7153.79) v2@2677,7190
  other v1: 4051,5893
PB4: J2.3 P3.38 R7.1 U3.134 | length 4281.9
  Top Layer w10: J2.3@2447,6699 2679,6699 R7.1@2680,6700 ; U3.134@4070,5895 4070,4745 ; 4082.61,4735.09 cw(c4073.2,4699.96) P3.38@4109.57,4700.01 ; P3.38@4100,4700 4095,4705 4095,4720 4070,4745 ; 2483.21,6699 cw(c2483.21,6735.21) 2457.61,6709.61 ccw(c2483.21,6735.21) 2483.21,6699 ; 2483.21,6699 ccw(c2483.21,6662.79) 2457.61,6688.39 cw(c2483.21,6662.79) 2483.21,6699 ; 2507.36,6699 cw(c2507.36,6759.36) 2464.68,6716.68 ccw(c2507.36,6759.36) 2507.36,6699 ; 2507.36,6699 ccw(c2507.36,6638.64) 2464.68,6681.32 cw(c2507.36,6638.64) 2507.36,6699 ; 4070,4745 cw(c4052.78,4727.78) 4073.77,4715.43 ccw(c4052.78,4727.78) 4070,4745 ; 2624.3,6699 ccw(c2624.3,6750.7) 2660.86,6714.14 cw(c2624.3,6750.7) 2624.3,6699 ; 2629.13,6699 cw(c2629.13,6654.13) 2660.86,6685.86 ccw(c2629.13,6654.13) 2629.13,6699 ; 2648.44,6699 ccw(c2648.44,6726.56) 2667.93,6707.07 cw(c2648.44,6726.56) 2648.44,6699 ; R7.1@2654.86,6699 ccw(c2654.86,6724.14) 2672.64,6706.36 cw(c2654.86,6724.14) R7.1@2654.86,6699 ; R7.1@2659.69,6699 cw(c2659.69,6680.69) 2672.64,6693.64 ccw(c2659.69,6680.69) R7.1@2659.69,6699 ; 4073.65,4741.35 ccw(c4100,4767.69) 4100,4730.43 cw(c4100,4767.69) 4073.65,4741.35 ; 4079.14,4735.86 cw(c4064.29,4721.01) 4082.39,4710.36 ccw(c4064.29,4721.01) 4079.14,4735.86
  Bottom Layer w10: v2(2679,6700) 2829,6550 3043,6550 3076,6517 3076,6310 3781,5605 v1@4070,5605 ; 2694.36,6684.64 cw(c2709.73,6700) 2688,6700 ccw(c2709.73,6700) 2694.36,6684.64 ; 2694.36,6684.64 ccw(c2679,6669.27) 2679,6691 cw(c2679,6669.27) 2694.36,6684.64 ; 4061.55,5605 cw(c4061.55,5595.55) 4068.23,5602.23 ccw(c4061.55,5595.55) 4061.55,5605
  other v1: 4070,5604
PB5: P3.37 U3.135 | length 1933.4
  Top Layer w10: U3.135@4090,5892 4090,4788 4149.43,4728.57 4149.43,4679.52 ; P3.37@4100,4600 4100,4630.09 4149.43,4679.52 ; P3.37@4103.04,4598.9 ccw(c4063.09,4639.81) 4120.27,4639.14 ; P3.37@4110.03,4591.75 ccw(c4063.9,4638.98) 4129.92,4638.2 ; 4149.43,4679.52 ccw(c4203.13,4625.82) 4129.55,4607.04 cw(c4203.13,4625.82) 4149.43,4679.52 ; P3.37@4100.48,4599.62 cw(c4143.78,4610.67) 4112.18,4642.27 ccw(c4143.78,4610.67) P3.37@4100.48,4599.62 ; P3.37@4110.17,4602.09 cw(c4163.56,4615.72) 4124.6,4654.69 ccw(c4163.56,4615.72) P3.37@4110.17,4602.09 ; P3.37@4119.86,4604.57 cw(c4183.34,4620.77) 4137.01,4667.11 ccw(c4183.34,4620.77) P3.37@4119.86,4604.57
PB6: P3.40 U3.136 | length 1793.8
  Top Layer w10: U3.136@4110,5899 4110,4800 4200,4710 P3.40@4200,4700 ; 4168.87,4739.91 ccw(c4208.14,4750.43) P3.40@4201.66,4710.3 ; 4172.87,4724.99 ccw(c4205.44,4733.72) P3.40@4200.07,4700.43 ; 4180.61,4735.63 cw(c4170.47,4697.79) P3.40@4209.54,4700.72 ; 4140.98,4769.02 cw(c4071.95,4700) 4169.57,4700 ccw(c4071.95,4700) 4140.98,4769.02 ; 4158.05,4751.95 cw(c4106.1,4700) 4179.57,4700 ccw(c4106.1,4700) 4158.05,4751.95 ; 4165.12,4744.88 ccw(c4200,4779.76) 4200,4730.43 cw(c4200,4779.76) 4165.12,4744.88 ; 4175.12,4734.88 cw(c4140.24,4700) 4189.57,4700 ccw(c4140.24,4700) 4175.12,4734.88
PB7: P3.39 U3.137 | length 1958.4
  Top Layer w10: U3.137@4130.35,5892 4130,5891.65 4130,4842 4249.43,4722.57 4249.43,4679.52 ; P3.39@4200,4600 4200,4630.09 4249.43,4679.52 ; P3.39@4203.04,4598.9 ccw(c4163.09,4639.81) 4220.27,4639.14 ; P3.39@4210.03,4591.75 ccw(c4163.9,4638.98) 4229.92,4638.2 ; 4249.43,4679.52 ccw(c4303.13,4625.82) 4229.55,4607.04 cw(c4303.13,4625.82) 4249.43,4679.52 ; P3.39@4200.48,4599.62 cw(c4243.78,4610.67) 4212.18,4642.27 ccw(c4243.78,4610.67) P3.39@4200.48,4599.62 ; P3.39@4210.17,4602.09 cw(c4263.56,4615.72) 4224.6,4654.69 ccw(c4263.56,4615.72) P3.39@4210.17,4602.09 ; P3.39@4219.86,4604.57 cw(c4283.34,4620.77) 4237.01,4667.11 ccw(c4283.34,4620.77) P3.39@4219.86,4604.57
PB8: P3.42 U3.139 | length 1740.2
  Top Layer w10: U3.139@4169,5892 4169,4833 4300,4702 P3.42@4300,4700 ; 4262.19,4740.57 cw(c4248.84,4690.77) P3.42@4299.57,4699.92 ; 4277.41,4736.49 cw(c4265.99,4693.87) P3.42@4309.42,4701.7 ; 4246.63,4755.37 cw(c4191.27,4700) 4269.57,4700 ccw(c4191.27,4700) 4246.63,4755.37 ; 4251.46,4750.54 ccw(c4300,4799.08) 4300,4730.43 cw(c4300,4799.08) 4251.46,4750.54 ; 4263.7,4738.3 cw(c4225.41,4700) 4279.57,4700 ccw(c4225.41,4700) 4263.7,4738.3 ; 4268.53,4733.47 ccw(c4300,4764.93) 4300,4720.43 cw(c4300,4764.93) 4268.53,4733.47
PB9: P3.41 U3.140 | length 1978.3
  Top Layer w10: U3.140@4189,5895 4189,4885 4349.43,4724.57 4349.43,4679.52 ; P3.41@4300,4600 4300,4630.09 4349.43,4679.52 ; P3.41@4303.04,4598.9 ccw(c4263.09,4639.81) 4320.27,4639.14 ; P3.41@4310.03,4591.75 ccw(c4263.9,4638.98) 4329.92,4638.2 ; 4349.43,4679.52 ccw(c4403.13,4625.82) 4329.55,4607.04 cw(c4403.13,4625.82) 4349.43,4679.52 ; P3.41@4300.48,4599.62 cw(c4343.78,4610.67) 4312.18,4642.27 ccw(c4343.78,4610.67) P3.41@4300.48,4599.62 ; P3.41@4310.17,4602.09 cw(c4363.56,4615.72) 4324.6,4654.69 ccw(c4363.56,4615.72) P3.41@4310.17,4602.09 ; P3.41@4319.86,4604.57 cw(c4383.34,4620.77) 4337.01,4667.11 ccw(c4383.34,4620.77) P3.41@4319.86,4604.57
PB10: P4.18 U3.69 | length 1990.6
  Top Layer w10: P4.18@3090.76,8047.53 ccw(c3136.59,8059.8) 3125.54,8013.66 ; P4.18@3100,8050 3150.05,7999.95 ; P4.18@3102.47,8059.24 cw(c3090.2,8013.41) 3136.34,8024.46 ; U3.69@3637,6748 3637,7441 3150.05,7927.95 3150.05,7999.95 ; 3133.6,8016.4 cw(c3165.44,8048.24) 3120.43,8049.45 ccw(c3165.44,8048.24) 3133.6,8016.4 ; 3133.6,8016.4 ccw(c3101.76,7984.56) 3100.55,8029.57 cw(c3101.76,7984.56) 3133.6,8016.4 ; 3150.04,7999.96 cw(c3197.47,8047.38) 3130.42,8049.18 ccw(c3197.47,8047.38) 3150.04,7999.96 ; 3150.04,7999.96 ccw(c3102.62,7952.53) 3100.82,8019.58 cw(c3102.62,7952.53) 3150.04,7999.96
PB11: P4.17 U3.70 | length 1974.1
  Top Layer w10: P4.17@3090.46,7949.28 ccw(c3129.53,7952.21) 3119.39,7914.37 ; P4.17@3098.34,7939.7 cw(c3091.86,7899.57) 3131.13,7910.09 ; P4.17@3099.93,7949.57 cw(c3094.56,7916.28) 3127.13,7925.01 ; P4.17@3100,7950 3100,7940 3618,7422 U3.70@3618,6748 ; P4.17@3100,7919.57 cw(c3100,7870.24) 3134.88,7905.12 ccw(c3100,7870.24) P4.17@3100,7919.57 ; P4.17@3110.43,7950 ccw(c3159.76,7950) 3124.88,7915.12 cw(c3159.76,7950) P4.17@3110.43,7950 ; P4.17@3120.43,7950 ccw(c3193.9,7950) 3141.95,7898.05 cw(c3193.9,7950) P4.17@3120.43,7950 ; P4.17@3130.43,7950 ccw(c3228.05,7950) 3159.02,7880.98 cw(c3228.05,7950) P4.17@3130.43,7950
PB12: P4.16 U3.73 | length 2076.9
  Top Layer w10: P4.16@2990.76,8047.51 ccw(c3036.63,8059.87) 3025.6,8013.67 ; P4.16@3000,8050 3050,8000 3050,7838.35 3457,7431.35 3457,6672.58 3465.58,6664 U3.73@3498,6664 ; P4.16@3002.49,8059.24 cw(c2990.13,8013.37) 3036.33,8024.4 ; 3033.57,8016.43 cw(c3065.34,8048.2) 3020.43,8049.44 ccw(c3065.34,8048.2) 3033.57,8016.43 ; 3033.57,8016.43 ccw(c3001.8,7984.66) 3000.56,8029.57 cw(c3001.8,7984.66) 3033.57,8016.43 ; 3050,8000 cw(c3097.32,8047.32) 3030.42,8049.16 ccw(c3097.32,8047.32) 3050,8000 ; 3050,8000 ccw(c3002.68,7952.68) 3000.84,8019.58 cw(c3002.68,7952.68) 3050,8000
PB13: P4.15 U3.74 | length 1944
  Top Layer w10: P4.15@3000,7950 3000,7861.48 3438,7423.48 3438,6664.71 3458.71,6644 U3.74@3496,6644 ; 3000,7876.53 cw(c3073.47,7876.53) 3021.52,7928.48 ccw(c3073.47,7876.53) 3000,7876.53 ; 3000,7876.53 ccw(c2926.53,7876.53) 2978.48,7928.48 cw(c2926.53,7876.53) 3000,7876.53 ; 3000,7900.67 cw(c3049.33,7900.67) 3014.45,7935.55 ccw(c3049.33,7900.67) 3000,7900.67 ; 3000,7900.67 ccw(c2950.67,7900.67) 2985.55,7935.55 cw(c2950.67,7900.67) 3000,7900.67 ; 3454.08,6648.64 ccw(c3465.31,6659.87) 3465.31,6643.98 cw(c3465.31,6659.87) 3454.08,6648.64
PB14: P4.14 U3.75 | length 2161.4
  Top Layer w10: P4.14@2890.82,8047.31 ccw(c2937.23,8060.89) 2926.39,8013.77 ; P4.14@2900,8050 2949.43,8000.57 ; P4.14@2902.69,8059.18 cw(c2889.11,8012.77) 2936.23,8023.61 ; U3.75@3496,6624 3447,6624 3419,6652 3419,7415.61 2949.43,7885.18 2949.43,8000.57 ; 2933.19,8016.81 cw(c2964.08,8047.71) 2920.42,8049.27 ccw(c2964.08,8047.71) 2933.19,8016.81 ; 2933.19,8016.81 ccw(c2902.29,7985.92) 2900.73,8029.58 cw(c2902.29,7985.92) 2933.19,8016.81 ; 2949.43,8000.57 cw(c2995.44,8046.58) 2930.41,8048.91 ccw(c2995.44,8046.58) 2949.43,8000.57 ; 2949.43,8000.57 ccw(c2903.42,7954.56) 2901.09,8019.59 cw(c2903.42,7954.56) 2949.43,8000.57
PB15: P4.13 U3.76 | length 1702.7
  Top Layer w10: P4.13@2900,7950 2900,7907.74 ; U3.76@3503,6605 3439.13,6605 3400,6644.13 3400,7407.74 2900,7907.74 ; 2900,7907.74 cw(c2914.12,7907.74) 2909.65,7921.14 ccw(c2914.12,7907.74) 2900,7907.74 ; 2900,7907.74 ccw(c2885.88,7907.74) 2890.35,7921.14 cw(c2885.88,7907.74) 2900,7907.74
PC0: P4.55 U3.26 | length 2309
  Top Layer w10: U3.26@4349.89,6467.07 4350.82,6468 4458,6468 4695,6705 4695,7645 P4.55@4999,7949 ; 4960.98,7909.11 ccw(c4947.12,7960.83) P4.55@4999.58,7950.09 ; 4976.61,7913.3 ccw(c4964.85,7957.2) P4.55@5009.37,7948.08 ; 4948.05,7898.05 cw(c5000,7846.1) 5000,7919.57 ccw(c5000,7846.1) 4948.05,7898.05 ; 4948.05,7898.05 ccw(c4896.1,7950) 4969.57,7950 cw(c4896.1,7950) 4948.05,7898.05 ; 4965.12,7915.12 cw(c5000,7880.24) 5000,7929.57 ccw(c5000,7880.24) 4965.12,7915.12 ; 4965.12,7915.12 ccw(c4930.24,7950) 4979.57,7950 cw(c4930.24,7950) 4965.12,7915.12
PC1: P4.54 U3.27 | length 1889.2
  Top Layer w10: U3.27@4350,6487 4444.7,6487 4676,6718.3 4676,7656.09 4949.43,7929.52 4949.43,7970.48 4920.48,7999.43 4918.48,7999.43 4899,8018.91 4900,8019.91 P4.54@4900,8050
PC2: P4.53 U3.28 | length 2217.1
  Top Layer w10: U3.28@4351,6506 4436.83,6506 4657,6726.17 4657,7707 P4.53@4900,7950 ; 4860.98,7909.11 ccw(c4847.12,7960.83) P4.53@4899.58,7950.09 ; 4876.61,7913.3 ccw(c4864.85,7957.2) P4.53@4909.37,7948.08 ; 4848.05,7898.05 cw(c4900,7846.1) 4900,7919.57 ccw(c4900,7846.1) 4848.05,7898.05 ; 4848.05,7898.05 ccw(c4796.1,7950) 4869.57,7950 cw(c4796.1,7950) 4848.05,7898.05 ; 4865.12,7915.12 cw(c4900,7880.24) 4900,7929.57 ccw(c4900,7880.24) 4865.12,7915.12 ; 4865.12,7915.12 ccw(c4830.24,7950) 4879.57,7950 cw(c4830.24,7950) 4865.12,7915.12
PC3: P4.52 U3.29 | length 2398.8
  Top Layer w10: U3.29@4347,6526 4429.96,6526 4638,6734.04 4638,7718.09 4849.43,7929.52 4849.43,7970.48 ; P4.52@4800,8050 4800,8019.91 4849.43,7970.48 ; P4.52@4806.66,8056.87 cw(c4752.87,8001.4) 4830.13,8002.59 ; P4.52@4813.62,8064.05 cw(c4776.64,8025.91) 4829.76,8026.73 ; 4849.43,7970.48 cw(c4903.04,8024.09) 4829.51,8042.58 ccw(c4903.04,8024.09) 4849.43,7970.48 ; P4.52@4800.42,8049.89 ccw(c4843.26,8039.12) 4812.02,8007.88 cw(c4843.26,8039.12) P4.52@4800.42,8049.89 ; P4.52@4810.12,8047.46 ccw(c4863.19,8034.11) 4824.49,7995.42 cw(c4863.19,8034.11) P4.52@4810.12,8047.46 ; P4.52@4819.82,8045.02 ccw(c4883.11,8029.1) 4836.96,7982.95 cw(c4883.11,8029.1) P4.52@4819.82,8045.02
PC4: P4.39 U3.44 | length 1231.4
  Top Layer w10: U3.44@4129,6748 4129,7872 4200,7943 P4.39@4200,7950